# EAGLE board strobeshnik-2 (EAGLE 5.04)
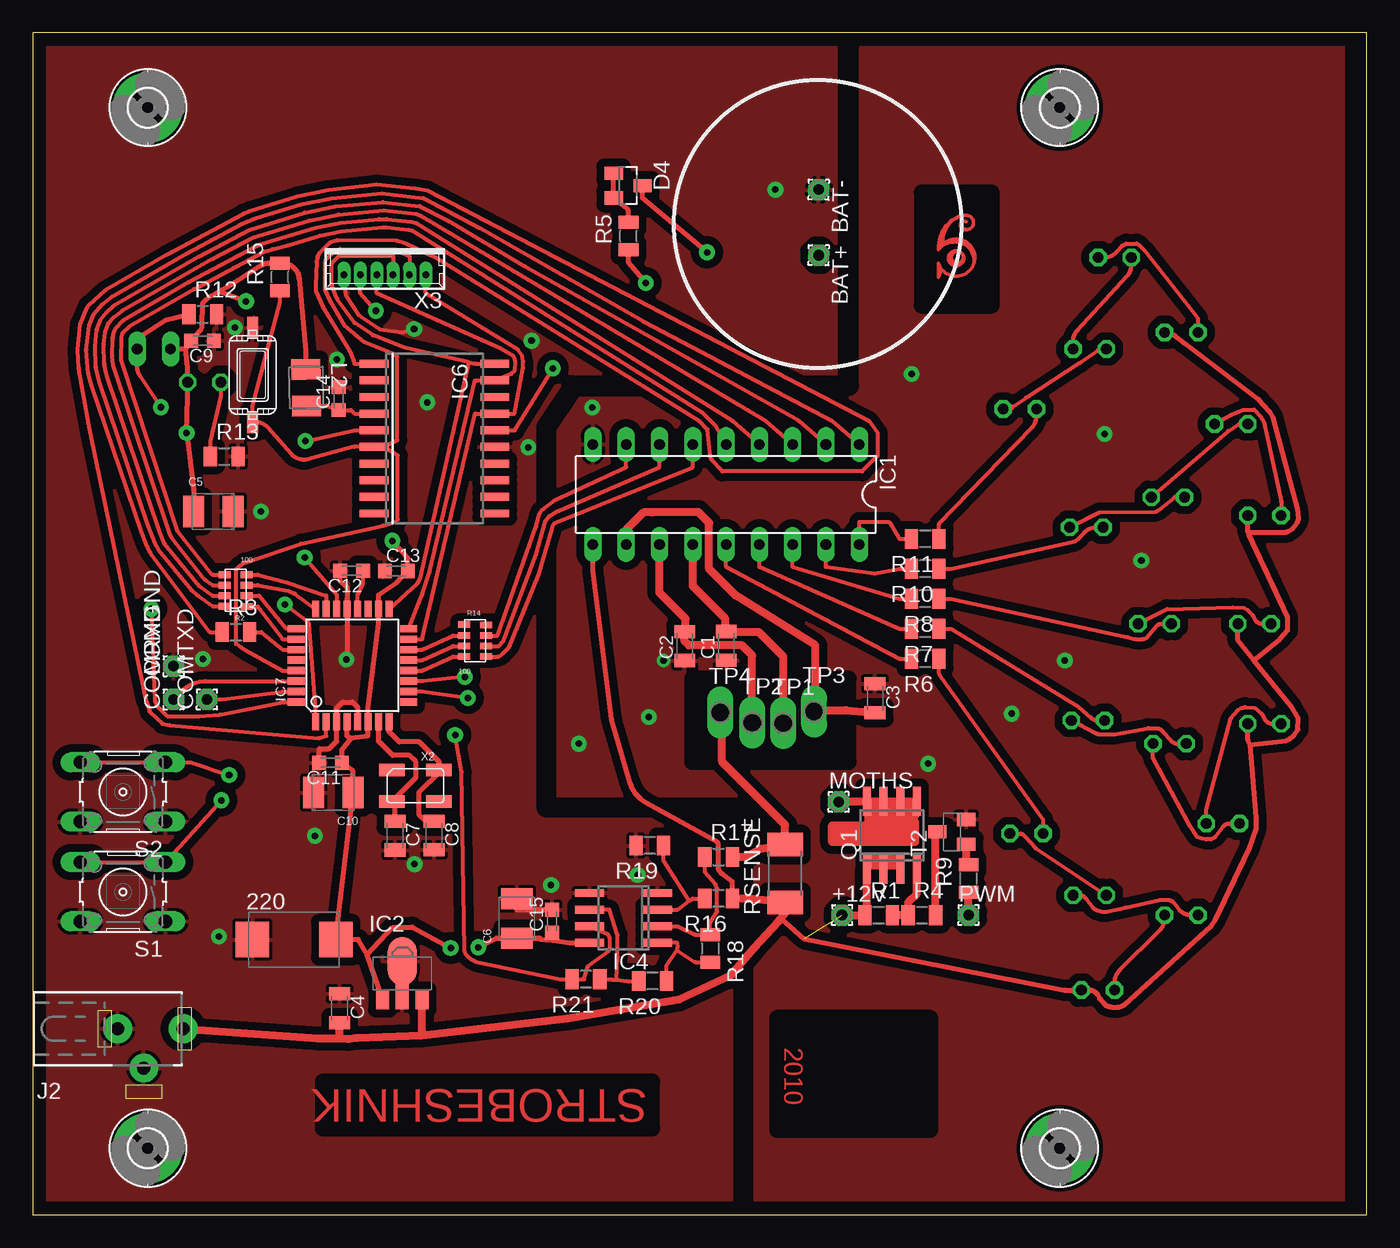
[diagram p0: board, top side]
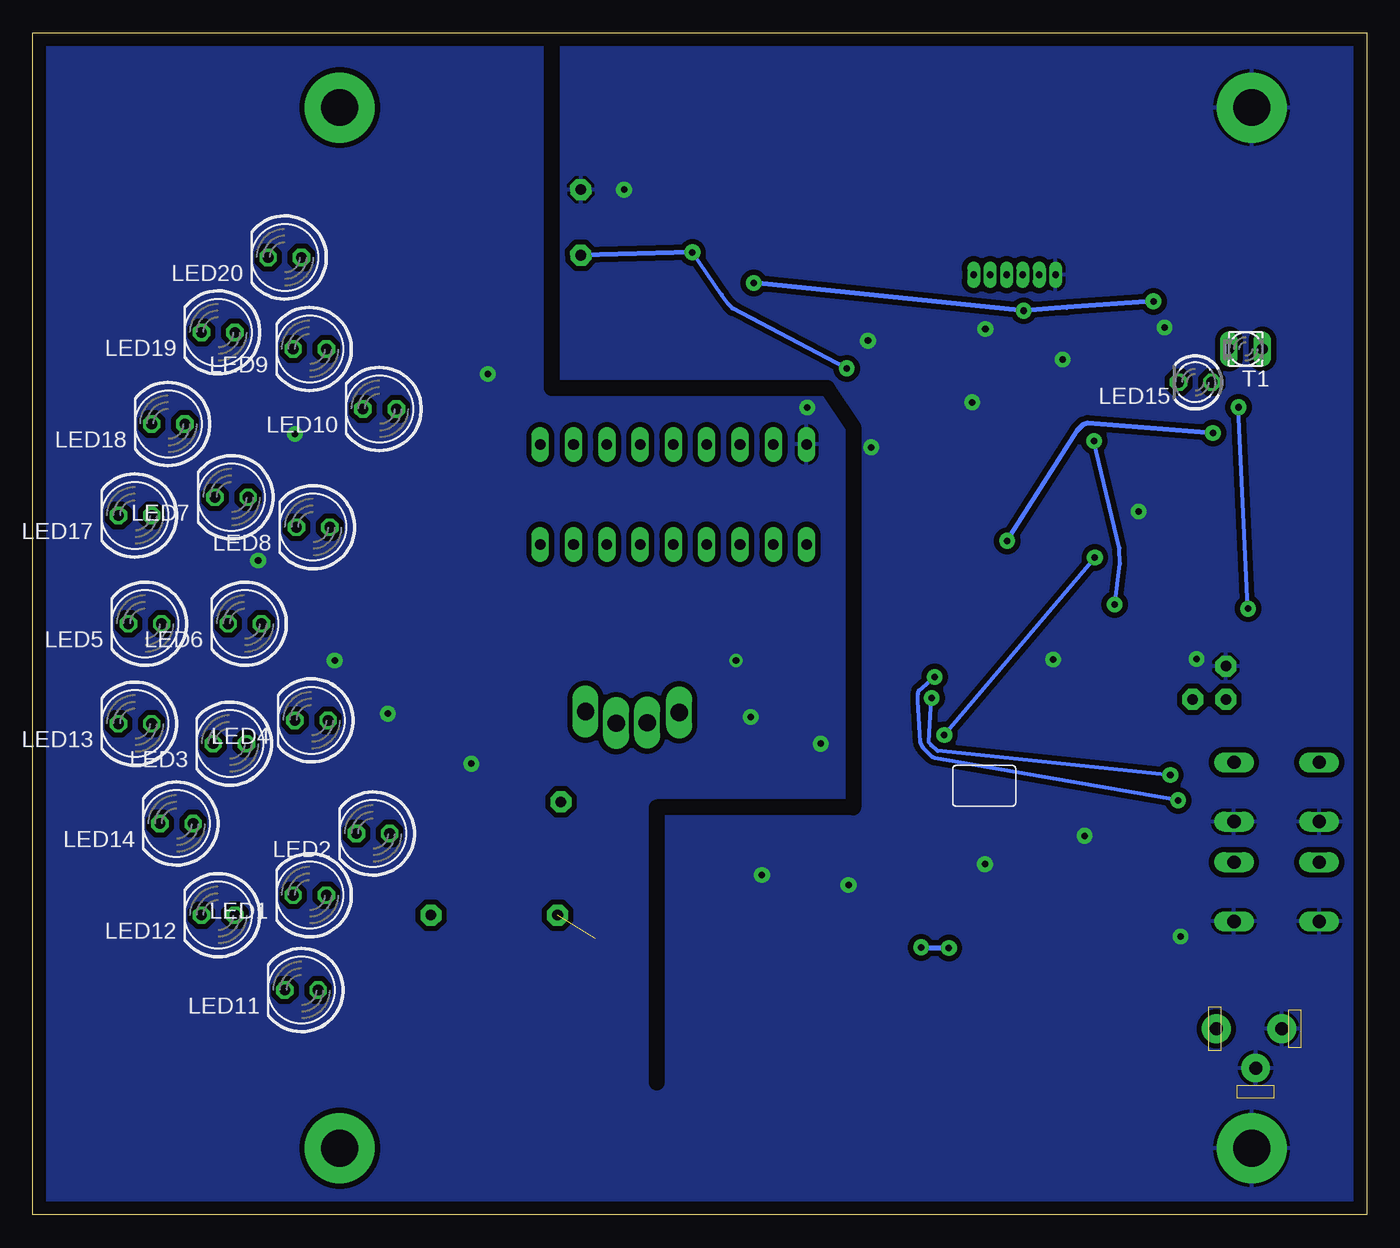
[diagram p1: board, bottom side, seen from below]

Size 101.78 x 90.16 mm. Coordinates in mm from the lower left corner, seen from the top.
Outline: 101.78,90.16 0,90.16 0,0 101.78,0 101.78,90.16
Copper layers (1*16): Top 0.035mm / dielectric 1.5mm / Bottom 0.035mm
Design rules "default": minimum track width 10mil, minimum drill 24mil, track to track 8mil, track to pad 8mil, pad to pad 8mil, via to via 8mil, smd to smd 8mil, copper to edge 40mil, drill to drill 8mil, minimum pad ring 10mil, minimum via ring 8mil, stop-mask expansion 4mil, vias tented up to drill 0mil, thermal gap 10mil
Net classes: 0 default: width 0.3 mm, drill 0.6 mm, clearance 0.25 mm; 1 supply1: width 0.4 mm, drill 0.6 mm, clearance 0.4 mm; 2 supply2: width 0.6 mm, drill 0.6 mm, clearance 0.4 mm
tRestrict: area 56.8,6.5 to 68.5,15; area 50.3,34.5 to 62.2,40.9; area 22.1,6.6 to 47.3,10.2; area 67.8,69.3 to 73.2,78; 6 lines
bRestrict: 6 lines

## Footprints (pad centres in the part's own frame; a part is rotated, then mirrored left to right if it is on the bottom)
D/7343-31R = smd 2.55 x 2.7: + 3.175,0; - -3.175,0
1,6/0,8 = drill 0.813 pad 1.6 octagon: 1 0,0
C0805K = smd 1 x 1.6: 1 -1.1,0; 2 1.1,0
SMC_B = smd 1.6 x 2.4: + -1.5,0; - 1.5,0
C0603K = smd 1.05 x 1.08: 1 -0.875,0; 2 0.875,0
SOT23@1 = smd 1 x 1.4: 1 -0.95,-1.1; 2 0.95,-1.1; 3 0,1.1
2,8-PAD = drill 2.8 pad 5.334 round: B2,8 0,0
DIL18 = drill 0.813 long: 1 -10.16,-3.81; 2 -7.62,-3.81; 3 -5.08,-3.81; 4 -2.54,-3.81; 5 0,-3.81; 6 2.54,-3.81; 7 5.08,-3.81; 8 7.62,-3.81; 9 10.16,-3.81; 10 10.16,3.81; 11 7.62,3.81; 12 5.08,3.81; 13 2.54,3.81; 14 0,3.81; 15 -2.54,3.81; 16 -5.08,3.81; 17 -7.62,3.81; 18 -10.16,3.81
SOT89 = smd 1 x 1.5: 1 -1.499,-1.981; 3 1.499,-1.981 | smd 1 x 2: 2 0,-1.727 | smd 2.2 x 3.7: 2@1 0,0.94
SO08 = smd 0.6 x 2.2: 1 -1.905,-2.6; 2 -0.635,-2.6; 3 0.635,-2.6; 4 1.905,-2.6; 5 1.905,2.6; 6 0.635,2.6; 7 -0.635,2.6; 8 -1.905,2.6
SO-20DW = smd 0.6 x 2.2: 1 -5.715,-4.6; 2 -4.445,-4.6; 3 -3.175,-4.6; 4 -1.905,-4.6; 5 -0.635,-4.6; 6 0.635,-4.6; 7 1.905,-4.6; 8 3.175,-4.6; 9 4.445,-4.6; 10 5.715,-4.6; 11 5.715,4.6; 12 4.445,4.6; 13 3.175,4.6; 14 1.905,4.6; 15 0.635,4.6; 16 -0.635,4.6; 17 -1.905,4.6; 18 -3.175,4.6; 19 -4.445,4.6; 20 -5.715,4.6
TQFP32-08 = smd 1.27 x 0.559: 1 -4.293,2.8; 2 -4.293,2; 3 -4.293,1.2; 4 -4.293,0.4; 5 -4.293,-0.4; 6 -4.293,-1.2; 7 -4.293,-2; 8 -4.293,-2.8; 17 4.293,-2.8; 18 4.293,-2; 19 4.293,-1.2; 20 4.293,-0.4; 21 4.293,0.4; 22 4.293,1.2; 23 4.293,2; 24 4.293,2.8 | smd 0.559 x 1.27: 9 -2.8,-4.293; 10 -2,-4.293; 11 -1.2,-4.293; 12 -0.4,-4.293; 13 0.4,-4.293; 14 1.2,-4.293; 15 2,-4.293; 16 2.8,-4.293; 25 2.8,4.293; 26 2,4.293; 27 1.2,4.293; 28 0.4,4.293; 29 -0.4,4.293; 30 -1.2,4.293; 31 -2,4.293; 32 -2.8,4.293
DCJ-SMALL = drill 1 pad 2.184 round: 1 0,3; 2 3,0; 3 0,-2
L3230M = smd 1.6 x 2.2: 1 -1.4,0; 2 1.4,0
LED5MM = drill 0.813 octagon: A -1.27,0; K 1.27,0
LED3MM = drill 0.813 octagon: A -1.27,0; K 1.27,0
SO-08 = smd 0.6 x 2.2: 1 -1.905,-2.6; 2 -0.635,-2.6; 3 0.635,-2.6; 4 1.905,-2.6; 5 1.905,2.6; 6 0.635,2.6; 7 -0.635,2.6; 8 -1.905,2.6
R0805 = smd 1 x 1.5: 1 -1.05,0; 2 1.05,0
RESSMD-YC16 = smd 0.508 x 0.914: R1$1 -1.23,-0.821; R1$2 -1.2,0.851; R2$1 -0.4,-0.821; R2$2 -0.4,0.851; R3$1 0.4,-0.821; R3$2 0.4,0.851; R4$1 1.2,-0.821; R4$2 1.2,0.851
R2010 = smd 1.8 x 2.7: 1 -2.2,0; 2 2.2,0
B3F-10XX = drill 1.016 long: 1 -3.251,2.261; 2 3.251,2.261; 3 -3.251,-2.261; 4 3.251,-2.261
SW_IT1181 = smd 1.676 x 0.813: P$1 -3.61,0; P$2 3.61,0
BPX81 = drill 0.813 long: C 1.27,0; E -1.27,0
SOT23-BEC = smd 1 x 1.4: B -0.95,-1.1; C 0,1.1; E 0.95,-1.1
P1-13Y = drill 1.321 pad 1.905 long: 1 0,0
XTAL_0532 = smd 1.93 x 0.965: 1 1.8,-1.2; 2 -1.8,-1.2; 3 -1.8,1.2; 4 1.8,1.2
53047-06 = drill 0.5 pad 0.698 long: 1 3.125,0.45; 2 1.875,0.45; 3 0.625,0.45; 4 -0.625,0.45; 5 -1.875,0.45; 6 -3.125,0.45

## Placement (x,y rotation side)
220  [D/7343-31R]  19.94,21 0 top
+12V  [1,6/0,8]  61.74,22.86 0 top
BAT+  [1,6/0,8]  59.96,73.2 269 top
BAT-  [1,6/0,8]  59.96,78.2 269 top
C1  10nF  [C0805K]  52.91,43.39 90 top
C2  10nF  [C0805K]  49.74,43.38 90 top
C3  10nF  [C0805K]  64.27,39.4 270 top
C4  2.2uF / 25V  [C0805K]  23.42,15.76 270 top
C5  10uF  [SMC_B]  13.78,53.66 0 top
C6  10uF/16V  [SMC_B]  36.93,22.62 90 top
C7  18  [C0805K]  27.64,28.93 270 top
C8  18  [C0805K]  30.62,28.94 270 top
C9  0.1  [C0603K]  12.95,66.67 180 top
C10  10uF  [SMC_B]  22.93,32.21 180 top
C11  100nF  [C0603K]  22.72,34.49 180 top
C12  100nF  [C0603K]  24.33,49.13 180 top
C13  100nF  [C0603K]  27.74,49.12 0 top
C14  100nF  [C0603K]  23.34,62.26 90 top
C15  100nF  [C0603K]  39.62,22.4 90 top
COMGND  [1,6/0,8]  10.74,41.85 90 top
COMRXD  [1,6/0,8]  10.74,39.31 90 top
COMTXD  [1,6/0,8]  13.28,39.31 90 top
D4  BAT54C  [SOT23@1]  45.42,78.51 270 top
H1  MOUNT-PAD-ROUND2.8  [2,8-PAD]  8.77,84.45 0 top
H2  MOUNT-PAD-ROUND2.8  [2,8-PAD]  78.36,84.45 0 top
H3  MOUNT-PAD-ROUND2.8  [2,8-PAD]  8.77,5.08 0 top
H4  MOUNT-PAD-ROUND2.8  [2,8-PAD]  78.36,5.08 0 top
IC1  [DIL18]  52.9,54.95 180 top
IC2  78L05F  [SOT89]  28.19,18.41 0 top
IC4  LM358D  [SO08]  45.08,22.65 90 top
IC6  DS3234  [SO-20DW]  30.66,59.21 270 top
IC7  MEGA8-AI  [TQFP32-08]  24.38,41.91 90 top
J2  [DCJ-SMALL]  8.48,14.2 270 top
L2  [L3230M]  20.87,63.1 271 top
LED1  ARL-5053UYC  [LED5MM]  80.65,24.38 180 bottom
LED2  [LED5MM]  75.82,29.08 180 bottom
LED3  [LED5MM]  86.74,35.94 180 bottom
LED4  [LED5MM]  80.52,37.72 180 bottom
LED5  [LED5MM]  93.22,45.09 180 bottom
LED6  [LED5MM]  85.6,45.09 180 bottom
LED7  [LED5MM]  86.61,54.74 180 bottom
LED8  [LED5MM]  80.39,52.45 180 bottom
LED9  [LED5MM]  80.65,66.04 180 bottom
LED10  [LED5MM]  75.31,61.47 180 bottom
LED11  [LED5MM]  81.28,17.14 180 bottom
LED12  [LED5MM]  87.63,22.86 180 bottom
LED13  [LED5MM]  93.98,37.46 180 bottom
LED14  [LED5MM]  90.81,29.84 180 bottom
LED15  L-34F3C  [LED3MM]  13.09,63.5 180 bottom
LED17  [LED5MM]  93.98,53.34 180 bottom
LED18  [LED5MM]  91.44,60.32 180 bottom
LED19  [LED5MM]  87.63,67.31 180 bottom
LED20  [LED5MM]  82.55,73.02 180 bottom
MOTHS  [1,6/0,8]  61.49,31.5 0 top
PWM  [1,6/0,8]  71.39,22.86 0 top
Q1  FDS6675  [SO-08]  65.55,28.96 0 top
R1  1K5  [R0805]  64.54,22.86 0 top
R2  100  [RESSMD-YC16]  15.49,47.62 90 top
R3  100  [R0805]  15.49,44.45 0 top
R4  470  [R0805]  67.84,22.86 0 top
R5  10K  [R0805]  45.45,74.66 90 top
R6  100  [R0805]  68.09,42.42 180 top
R7  100  [R0805]  68.09,44.7 180 top
R8  330  [R0805]  68.09,46.99 180 top
R9  100  [R0805]  71.39,25.65 90 top
R10  100  [R0805]  68.09,49.28 180 top
R11  100  [R0805]  68.09,51.56 180 top
R12  5K  [R0805]  12.97,68.7 0 top
R13  220  [R0805]  14.61,57.85 0 top
R14  100  [RESSMD-YC16]  33.74,43.79 270 top
R15  10K  [R0805]  18.86,71.54 90 top
R16  9K  [R0805]  52.32,24.13 180 top
R17  9K  [R0805]  52.32,27.3 0 top
R18  1K  [R0805]  51.69,20.32 270 top
R19  1K  [R0805]  47.07,28.17 180 top
R20  1K  [R0805]  47.29,17.84 180 top
R21  110K  [R0805]  42.21,17.97 180 top
RSENSE  0.3  [R2010]  57.4,26.03 90 top
S1  [B3F-10XX]  6.88,24.64 180 top
S2  [B3F-10XX]  6.88,32.26 180 top
SW1  BUTTON-IT_1181  [SW_IT1181]  16.78,64.07 270 top
T1  L-32P3C  [BPX81]  9.24,66.04 180 bottom
T2  BTA42  [SOT23-BEC]  70.12,29.21 90 top
TP1  TPPAD1-13Y  [P1-13Y]  57.26,37.5 0 top
TP2  TPPAD1-13Y  [P1-13Y]  54.89,37.54 0 top
TP3  TPPAD1-13Y  [P1-13Y]  59.61,38.39 0 top
TP4  TPPAD1-13Y  [P1-13Y]  52.46,38.33 0 top
X2  20.000  [XTAL_0532]  29.19,32.73 180 top
X3  53047-06  [53047-06]  26.87,72.15 180 top

## Library data of the parts
220 C1-C15 L2 R1 R3-R13 R15-R21 RSENSE = rcl
+12V BAT+ BAT- COMGND COMRXD COMTXD MOTHS PWM = wirepad
D4 = diode
H1-H4 = holes
IC1 = uln-udn
IC2 IC4 = linear
IC6 = 0-ds3234
IC7 = atmel
J2 LED1-LED15 LED17-LED20 R2 R14 SW1 X2 = 0-svo
Q1 = transistor-power
S1 S2 = switch-omron
T1 = opto-trans-siemens
T2 = transistor
TP1-TP4 = testpad
X3 = con-molex

## Nets
+5V: 220.+ C5.+ C6.+ C9.2 C10.+ C11.1 C13.2 C15.1 IC2.1 IC4.8 IC7.4 IC7.6 IC7.18 L2.1 LED15.A R5.1 R15.2 T1.C X3.2
+12V [supply1]: +12V.1 C4.2 IC1.10 IC2.3 J2.1 LED5.A LED11.A LED13.A LED17.A LED19.A Q1.1 R1.1 R16.1 RSENSE.1
BTN+: IC7.11 S1.3 S1.4
BTNSET: IC7.10 S2.3 S2.4
GND: 220.- BAT-.1 C1.1 C2.1 C3.1 C4.1 C5.- C6.- C7.2 C8.2 C9.1 C10.- C11.2 C12.2 C13.1 C14.2 C15.2 COMGND.1 H1.B2,8 H3.B2,8 IC1.9 IC2.2 IC2.2@1 IC4.4 IC4.5 IC6.15 IC7.3 IC7.5 IC7.21 J2.2 J2.3 R12.2 R13.2 R19.2 S1.1 S1.2 S2.1 S2.2 SW1.P$1 T2.E X3.1
INDEX: IC7.32 R12.1 T1.E
L1: IC1.5 R2.R4$2
L1X: IC7.23 R2.R4$1
L2: IC1.4 R2.R3$2
L2X: IC7.24 R2.R3$1
L3: IC1.3 R2.R2$2
L3X: IC7.25 R2.R2$1
L4: IC1.2 R2.R1$2
L4X: IC7.26 R2.R1$1
L5: IC1.1 R3.1
L5X: IC7.27 R3.2
LL1: IC1.14 R6.2
LL2: IC1.15 R7.2
LL3: IC1.16 R8.2
LL4: IC1.17 R10.2
LL5: IC1.18 R11.2
M1: IC1.6 R14.R4$2
M2: IC1.7 R14.R3$2
M3: IC1.8 R14.R2$2
MISO: IC6.19 IC7.16 X3.3
MODHS: MOTHS.1 Q1.5
MOSI: IC6.17 IC7.15 X3.6
N$1: D4.1 D4.2 R5.2
N$2: IC6.18
N$3: C12.1 IC7.20
N$4: R9.2 T2.B
N$6: Q1.4 R1.2 R4.1
N$9: BAT+.1 D4.3 IC6.16
N$10: C1.2 IC1.13 TP1.1
N$11: C2.2 IC1.12 TP2.1
N$12: C3.2 IC1.11 TP3.1
N$14: LED1.K LED2.A
N$15: LED3.K LED4.A
N$16: LED5.K LED6.A
N$17: LED7.K LED8.A
N$18: LED9.K LED10.A
N$19: LED2.K R6.1
N$20: LED4.K R7.1
N$21: LED6.K R8.1
N$22: LED8.K R10.1
N$23: LED10.K R11.1
N$25: LED1.A LED12.K
N$26: LED11.K LED12.A
N$27: LED13.K LED14.A
N$29: LED17.K LED18.A
N$30: LED19.K LED20.A
N$31: IC7.14 R14.R2$1
N$32: IC7.13 R14.R3$1
N$33: LED15.K R13.1
N$34: IC7.12 R14.R4$1
N$35: IC4.1 R18.2 R20.1
N$36: IC4.2 R17.1 R18.1
N$37: IC4.3 R16.2 R19.1
N$38: R17.2 RSENSE.2 TP4.1
N$39: IC4.6 R20.2 R21.1
N$40: LED3.A LED14.K
N$41: LED7.A LED18.K
N$42: LED9.A LED20.K
N$43: R4.2 T2.C
N$53: C14.1 IC6.4 L2.2
PWM: PWM.1 R9.1
RESET#: IC6.6 IC7.29 R15.1 SW1.P$2 X3.5
RTCINT: IC6.5 IC7.1
RTCSEL#: IC6.1 IC7.2
RXD: COMRXD.1 IC7.30
SCK: IC6.20 IC7.17 X3.4
SENSE: IC4.7 IC7.22 R21.2
TXD: COMTXD.1 IC7.31
XTAL1: C7.1 IC7.7 X2.4
XTAL2: C8.1 IC7.8 X2.2

## Tracks (layer width: path | path; a pad name or v marks a point on that pad's centre or on a via)
+5V  (via drill 0.5 pad 1.2)
  Top 0.3: X3.2 24.99,70.3 v26.18,68.96
  Top 0.4: 20.82,65.9 | 20.82,65.9 20.32,71.43 arc85 19.05,72.59 R15.2 18.04,72.59 arc33 17.35,72.38 14.93,70.84 14.23,70.44 | 20.82,65.9 L2.1 | 24.27,36.3 23.98,36.53 IC7.4 | 24.27,36.3 23.59,35.48 C11.1 24.43,33.86 C10.+ 220.+ 24.84,21 25.52,19.84 | 24.27,36.3 | 24.27,36.3 24.35,36.39 25.58,36.53 IC7.6 25.58,38.7 26.38,45.12 IC7.18 26.38,47.29 27.75,48.2 C13.2 28.61,50.11 v27.44,51.41 | R5.1 45.45,72.66 v46.77,71.09 | C5.+ 12.28,55.31 v11.74,59.64 11.82,62.39 LED15.A 11.82,64.61 11.67,66.04 | IC4.8 40.93,20.74 39.72,20.95 39.57,20.96 | 38.67,21.1 38.67,21.03 39.57,20.96 | 39.57,20.96 C15.1 | 25.52,19.84 27.47,21.92 28.95,21.95 v31.88,20.36 | v34,20.41 35.37,21.1 | 11.67,66.04 T1.C | IC2.1 25.52,19.84 | 11.67,66.04 C9.2 12.78,67.44 12.92,67.74 12.97,69.52 arc-29 13.58,70.07 14.23,70.44 | 14.23,70.44 v16.28,69.68 | L2.1
  Top 0.406: 35.37,21.1 36.93,21.1 | 36.93,21.1 C6.+ 36.93,21.1 | 36.93,21.1 38.67,21.1
  Bottom 0.4: v46.77,71.09 v26.18,68.96 22.88,69.21 v16.28,69.68 | v27.44,51.41 22.06,59.86 21.64,60.28 21.3,60.41 v11.74,59.64 | v31.88,20.36 33.95,20.36 v34,20.41
+12V  (1 unrouted)
  Top 0.4: IC1.10 42.74,49.12 44.17,37.8 45.57,32.96 arc45 46.78,31.45 52.27,28.41 52.3,28.23 52.32,28.11 52.33,26.34 52.63,25.98 53.37,25.42 R16.1 | LED5.A 91.95,43.82 93.17,42.31 | 92.88,35.87 95.65,36.17 95.86,36.28 96.25,36.61 96.53,37 96.54,37.89 95.99,38.83 93.17,42.31 | 93.17,42.31 95.15,43.91 95.76,44.57 95.75,45.6 92.79,51.9 92.79,52.08 | LED17.A 92.71,52.08 92.79,52.08 | 92.88,35.87 92.71,36.2 LED13.A | 92.88,35.87 93.35,30.27 93.35,29.46 92.8,27.93 90.22,22.46 89.9,22 83.34,16.06 arc-26 83.08,15.92 82.82,15.84 82.33,15.85 arc-16 82.15,15.88 82.05,15.91 arc-30 81.76,16.08 81.4,16.47 81.21,16.82 arc61 80.65,17.14 LED11.A 78.75,17.14 58.85,21.08 57.09,22.62 | 92.88,35.87 | 92.79,52.08 95.68,52.07 95.77,52.11 96.14,52.33 96.47,52.79 96.58,53.1 96.5,53.82 94.63,60.81 94.37,61.25 93.55,62.18 87.8,66.5 87.22,66.96 arc90 86.27,67.01 LED19.A
  Top 0.6: 23.42,13.46 | 23.42,13.46 21.76,13.46 J2.1 | 23.42,13.46 24.07,13.42 24.7,13.51 29.69,13.71 | 23.42,13.46 C4.2 | 29.69,13.71 40.8,14.98 48.88,16.35 49.32,16.44 53.33,18.33 55.03,20.34 55.05,20.37 56.9,22.37 57.09,22.62 57.68,23.37 RSENSE.1 54.57,24.13 R16.1 | 29.69,13.71 IC2.3
  Top 0.61: Q1.1 63.65,23.02 R1.1 +12V.1
BTN+  (via drill 0.5 pad 1.2)
  Top 0.3: 29.77,40.71 IC7.11 | S1.4 S1.3 v14.4,31.62
  Top 0.32: v32.96,41.03 29.77,40.71
  Bottom 0.32: v14.4,31.62 32.95,34.84 33.17,34.93 33.86,35.63 34.04,36.03 34.25,39.2 34.23,39.73 34.17,39.99 v32.96,41.03
BTNSET  (via drill 0.5 pad 1.2)
  Top 0.3: S2.4 S2.3 12.05,34.52 v14.98,33.55
  Top 0.32: IC7.10 29.72,39.91 v33.2,39.42
  Bottom 0.32: v14.98,33.55 32.75,35.39 33.22,35.81 33.41,36.08 v33.2,39.42
GND  (via drill 0.5 pad 1.02, 0.5 pad 1.2)
  Top 0.305: 23.7,71.78 23.9,70.1 24.91,68.58 26.44,67.56 28.21,67.31 28.98,67.56
  Top 0.4: IC7.5 24.78,38.74 24.4,39.12 23.64,39.12 23.13,38.61 23.18,38.56 IC7.3 23.18,36.12 22.63,35.56 21.86,35.56 21.86,34.54 | C12.2 23.45,48.33 24,47.78 24,46.98 | 24,46.98 24,42.43 v23.93,42.36 | IC7.21 23.98,46.96 24,46.98
  Top 0.406: C15.2 36.93,23.27 C6.-
  other vias: 42.69,61.59 21.52,28.91 46.14,25.93 48.12,42.27 17.4,53.66 56.66,78.2 14.19,21.23 37.8,58.55 29.1,67.57 15.42,67.69 23.2,65.24 12.99,42.4 29.13,26.75 30.1,61.98 46.99,37.97 67.06,64.14 81.79,59.56 84.58,49.91 68.33,34.42 74.68,38.23 78.74,42.29 41.66,35.94 38.06,66.67 39.54,25.17
  pour Bottom (isolate 0.406): -6.08,90.17 103.78,90.17 103.78,0 -6.08,0
  pour Top (isolate 0.61): 99.95,90.8 99.95,-0.63 -12.45,-0.63 -12.45,90.17 arc-90 -11.81,90.8
GRUU1
  Top 0.254: 71.25,75.74 arc128 70.78,75.42 arc232 71.33,76.22 arc38 70.85,76.22 arc71 69.11,73.91 69.11,73.6 69.43,73.99 arc-298 69.11,72.56 69.11,71.53 69.35,72.09
GRUU2
  Top 0.254: 69.27,73.83 69.59,74.02 arc-23 70.08,74.18 70.26,74.2 arc-25 70.8,74.14 71.01,74.07 71.25,73.9 arc-34 71.7,73.31 71.73,73.26 arc-21 71.81,72.81 71.81,72.64
GRUU3
  Top 0.254: 70.22,75.9 69.83,75.46 arc23 69.58,75.02 69.49,74.74 arc18 69.43,74.34 69.43,74.07 69.35,73.99 69.27,74.31
INDEX  (via drill 0.5 pad 1.2)
  Top 0.3: IC7.32 19.06,39.11 14.26,38.15 12.67,38.03 10.27,38.05 9.52,38.76 | 9.35,39.21 v9.05,46.24
  Top 0.32: 9.52,38.76 9.35,39.21 | v9.78,61.6 8.18,63.99 arc-34 7.97,64.7 T1.E
  Top 0.4: 8.11,66.04 T1.E 8.46,67.16 10.17,68.27 R12.1
  Bottom 0.32: v9.05,46.24 v9.78,61.6
L1
  Top 0.3: IC1.5 52.13,60.15 51.09,61.19 28.89,75.09 28.72,75.13 28.66,75.13 26.98,75.31 26.68,75.31 23.54,75.02 21.89,74.69 19.48,73.94 18.3,73.66 17.65,73.46 12.3,70.61 7.38,67.77 6.87,67.27 6.79,66.97 6.74,65.23 11.06,52.14 13.71,48.82 R2.R4$2
L1X
  Top 0.3: IC7.23 22.38,47.24 19.36,48.23 17.17,48.82 R2.R4$1
L2
  Top 0.3: IC1.4 53.37,60.56 29.22,75.66 28.9,75.74 27.01,75.94 26.42,75.94 23.48,75.66 21.55,75.28 17.45,74.07 16.88,73.8 11.93,71.16 6.9,68.22 6.32,67.62 6.17,67.25 6.1,66.85 6.07,65.49 6.12,64.81 10.47,51.87 10.62,51.63 13.16,48.42 13.71,48.02 R2.R3$2
L2X
  Top 0.3: R2.R3$1 17.17,48.02 19.49,47.6 20,47.39 IC7.24
L3
  Top 0.3: IC1.3 55.91,60.56 29.59,76.2 29.24,76.34 26.77,76.61 23.31,76.29 21.05,75.84 16.85,74.56 13.73,72.91 6.83,68.97 6.16,68.46 5.8,68.04 5.51,67.33 5.41,66.37 5.46,64.92 5.62,64.03 9.68,52.12 10.08,51.16 12.74,47.92 13.71,47.23 R2.R2$2
L3X
  Top 0.3: R2.R2$1 17.27,47.23 19.31,44.74 IC7.25
L4
  Top 0.3: IC1.2 58.45,60.56 37.57,72.32 31.75,75.78 29.53,76.94 26.72,77.25 23.09,76.91 20.73,76.44 16.57,75.13 12.67,73.08 6.17,69.33 5.63,68.84 5.17,68.27 4.89,67.49 4.76,66.25 4.82,64.69 5.05,63.59 8.81,52.56 9.41,51.04 9.61,50.71 12.11,47.62 12.63,47.2 13.71,46.42 R2.R1$2
L4X
  Top 0.3: IC7.26 19.06,43.91 17.17,46.39 R2.R1$1
L5
  Top 0.3: IC1.1 60.99,60.56 46.63,68.11 34.04,75.28 29.82,77.54 26.63,77.91 22.79,77.53 20.48,77.08 17.08,76.05 15.98,75.59 11.77,73.34 5.99,70 5.35,69.49 4.63,68.69 4.29,67.85 4.08,65.99 4.14,65.09 4.24,64.19 4.49,63.24 8.29,52.05 8.74,50.97 8.96,50.51 13.51,44.45 R3.1
L5X
  Top 0.3: IC7.27 19.06,43.11 17.44,44.45 R3.2
LL1
  Top 0.3: 52.9,49.42 | 52.9,49.42 66.14,42.42 R6.2 | 52.9,49.42 IC1.14
LL2
  Top 0.3: IC1.15 55.44,49.42 66.14,44.7 R7.2
LL3
  Top 0.3: IC1.16 57.98,49.42 66.14,46.99 R8.2
LL4
  Top 0.3: IC1.17 60.52,49.42 64.17,48.92 64.3,48.92 66.14,49.28 R10.2
LL5
  Top 0.3: IC1.18 63.06,52.86 63.5,52.86 63.69,52.85 65.31,52.85 65.36,52.82 65.42,52.76 66.14,51.56 R11.2
M1
  Top 0.3: R14.R4$2 35.53,42.59 35.87,42.83 36.34,43.3 38.62,48.92 39.6,52.3 39.69,52.6 39.85,52.79 50.36,57.04 IC1.6
M2
  Top 0.3: R14.R3$2 35.53,43.39 35.91,43.78 38.41,50.36 39.13,52.92 39.41,53.3 39.97,53.63 47.82,57.04 IC1.7
M3
  Top 0.3: R14.R2$2 35.45,44.19 38.41,52.51 38.68,53.48 38.91,53.82 39.8,54.49 45.28,57.04 IC1.8
MISO
  Top 0.3: X3.3 26.24,70.3 35.74,66.05 36.65,65.53 36.75,65.37 36.83,65.03 36.79,64.43 36.51,64.15 IC6.19 33.75,63.65 30.3,49.05 29.72,47.29 IC7.16
MODHS
  Top 0.61: Q1.5 61.55,31.56 MOTHS.1
MOSI
  Top 0.3: X3.6 29.99,70.3 37.01,66.01 37.31,65.56 37.42,65.09 37.42,64.6 36.75,61.11 IC6.17 33.75,61.11 29.71,43.91 IC7.15
N$1
  Top 0.4: R5.2 45.45,76.66 D4.2 D4.1
N$3
  Top 0.32: C12.1 25.2,48.18 24.78,47.25 IC7.20
N$4
  Top 0.61: T2.B 71.22,26.87 R9.2
N$5
  Top 0.61: 63.77,26.67 66.06,26.67
N$6
  Top 0.61: R1.2 R4.1 66.82,22.89 66.82,23.88 67.46,24.51 Q1.4
N$7
  Top 0.61: 63.77,27.18 66.06,27.18
N$8
  Top 0.61: 63.77,30.99 67.33,30.99
N$9  (via drill 0.5 pad 1.2)
  Top 0.32: IC6.16 36.77,59.84 | 36.77,59.84 | 36.77,59.84 v39.68,64.57
  Top 0.4: D4.3 46.52,77.55 v51.45,73.41
  Bottom 0.32: v39.68,64.57 48.41,69.14 48.71,69.46 49.22,70.18 v51.45,73.41
  Bottom 0.4: v51.45,73.41 BAT+.1
N$10
  Top 0.61: TP1.1 57.26,42.58 55.39,44.45 52.95,44.45 C1.2 52.85,44.55 52.85,45.47 50.36,47.96 IC1.13
N$11
  Top 0.61: TP2.1 54.88,42.67 54.12,43.43 50.06,43.43 49.74,43.75 C2.2 49.8,44.54 49.8,45.47 47.82,47.45 IC1.12
N$12
  Top 0.61: IC1.11 45.28,52.25 46.6,53.58 47.25,53.58 47.26,53.59 50.31,53.59 50.79,53.59 51.6,52.78 51.6,49.28 51.7,49.15 53.61,47.24 59.71,43.43 59.71,38.49 | TP3.1 59.71,38.49 | 59.71,38.49 62.05,38.49 C3.2
N$13
  Top 0.61: 67.33,30.48 63.77,30.48 63.77,29.97 67.33,29.97 67.33,29.46 63.77,29.46 63.77,29.21 67.33,29.21 67.33,28.7 63.77,28.7
N$14
  Top 0.3: LED2.A 75.33,29.08 arc-48 75.7,28.87 76.52,27.96 LED1.K
N$15
  Top 0.3: LED4.A 81.11,36.73 arc28 81.4,36.66 82.57,36.65 85.1,37.12 85.73,37.11 arc-49 86.2,36.9 86.86,36.15 arc48 87.34,35.94 LED3.K
N$16
  Top 0.3: LED6.A 86.53,46.2 91.54,46.34 92.43,46.3 92.68,46.15 93.07,45.73 93.25,45.41 arc61 93.8,45.09 LED5.K
N$17
  Top 0.3: LED7.K 87.12,54.74 85.86,53.72 85.69,53.64 81.36,53.57 LED8.A
N$18
  Top 0.3: LED10.A 74.5,61.47 arc51 74.78,61.64 75.81,62.33 79.9,64.98 81.23,65.92 arc-48 81.68,66.04 LED9.K
N$19
  Top 0.3: R6.1 69.14,41.27 77.09,30.14 arc-90 77.09,30.14 LED2.K
N$20
  Top 0.3: R7.1 70.04,44.7 79.79,38.75 80.74,37.93 arc48 81.21,37.72 LED4.K
N$21
  Top 0.3: R8.1 70.04,46.99 83.54,44.06 84.13,43.91 84.68,43.91 85,44 85.72,44.88 arc-47 86.09,45.09 LED6.K
N$22
  Top 0.3: R10.1 70.04,49.28 79.55,51.39 79.83,51.6 80.22,52.03 arc-48 81.16,52.45 LED8.K
N$23
  Top 0.3: R11.1 69.14,52.71 76.22,60.04 arc44 76.58,60.92 LED10.K
N$24
  Top 0.61: 63.52,29.72 60.98,29.72 60.98,28.45 67.33,28.45
N$25
  Top 0.3: LED1.A 79.88,24.38 arc-58 80.34,24.12 80.86,23.44 arc41 81.89,23.1 82.8,23.3 83.33,23.44 86.02,24.02 86.59,24.02 arc-50 87.09,23.77 87.46,23.29 arc49 88.41,22.86 LED12.K
N$26
  Top 0.3: LED11.K 82.55,17.74 arc-45 82.92,18.64 85.99,21.71 arc45 86.36,22.6 LED12.A
N$27
  Top 0.3: LED14.A 89.54,30.91 91.41,37.86 91.95,38.49 92.21,38.65 92.5,38.73 93.22,38.68 93.77,38.21 94.01,37.79 arc60 94.56,37.46 LED13.K
N$28
  Top 0.61: 63.52,29.21 61.49,29.21 61.49,28.96 63.27,28.96
N$29
  Top 0.3: LED17.K 95.25,54.4 93.91,60.51 93.68,60.88 93.2,61.41 92.36,61.41 91.46,61.03 LED18.A
N$30
  Top 0.3: LED19.K 88.9,68.37 84.78,73.61 84.41,73.96 84.23,74.09 83.43,74.09 83.12,73.94 82.72,73.47 arc-49 81.76,73.02 LED20.A
N$31
  Top 0.3: 32.07,44.19 R14.R2$1 | 32.07,44.19 29.71,43.11 IC7.14 | 32.07,44.19
N$32
  Top 0.3: 32.07,43.39 R14.R3$1 | 32.07,43.39 29.71,42.31 IC7.13 | 32.07,43.39
N$33
  Top 0.32: LED15.K 14.36,62.43 13.56,59.01 R13.1
N$34
  Top 0.3: R14.R4$1 32.07,42.59 29.71,41.51 IC7.12
N$35
  Top 0.32: 49.16,20.2 | 49.16,20.2 49.22,20.47 49.19,20.74 IC4.1 | 49.16,20.2 48.34,18.99 R20.1 | 49.16,20.2 50.53,19.27 R18.2
N$36
  Top 0.32: R17.1 51.27,26.15 52.11,25.21 52.22,24.91 52.21,23.15 51.69,22.28 R18.1 50.53,21.37 49.19,22.01 IC4.2
N$37
  Top 0.32: 50.06,23.94 48.12,27.01 R19.1 | 50.06,23.94 49.19,23.28 IC4.3 | 50.06,23.94 | 50.06,23.94 50.36,24.13 R16.2
N$38
  Top 0.6: R17.2 54.41,27.3 55.51,27.94 RSENSE.2
  Top 0.61: RSENSE.2 57.4,29.74 52.6,34.54 52.6,38.19 TP4.1
N$39
  Top 0.32: R21.1 44.17,17.97 44.17,17.94 44.55,17.92 | R20.2 45.33,17.84 44.62,17.92 44.55,17.92 | 44.55,17.92 44.62,19.67 44.62,21.33 43.99,23.28 IC4.6
N$40
  Top 0.3: LED3.A 85.47,34.88 88.27,29.68 88.87,28.82 89.2,28.69 89.53,28.64 89.9,28.65 90.22,28.81 90.82,29.62 arc-50 91.31,29.84 LED14.K
N$41
  Top 0.3: LED18.K 92.05,60.32 91.2,59.78 LED7.A
N$42
  Top 0.3: LED9.A 79.38,66.61 arc-42 79.71,67.46 83.49,71.6 arc42 83.82,72.46 LED20.K
N$43
  Top 0.61: R4.2 68.89,29.07 T2.C
N$53
  Top 0.32: IC6.4 24.55,61.11 24.29,61.39 C14.1 22.4,61.72 | L2.2 22.4,61.72 | 22.4,61.72
PWM
  Top 0.61: PWM.1 R9.1
RESET#
  Top 0.3: 26.7,58.54 27.81,59.09 27.81,65.43 27.59,65.65 25.3,66.57 23.79,67.82 22.71,69.63 22.32,70.58 22.3,71.15 22.3,71.46 22.3,72.63 22.35,72.85 23.09,73.59 23.42,73.65 27.61,73.64 27.71,73.63 27.97,73.51 28.74,73.11 X3.5 | IC7.29 19.06,41.51 16.18,43.1 15.84,43.3 15.5,43.55 15.51,46.04 15.51,49.22 15.75,49.47 16.16,49.74 20.47,51.2 26.73,52.57 27.71,52.87 27.84,53.03 27.84,57.94 27.42,58.22 26.7,58.54 | 18.86,69.61 R15.1 | 24.5,58.57 21.03,57.64 arc-64 19.75,58.02 17.96,60.03 arc48 17.01,60.46 SW1.P$2 | 26.7,58.54 | 26.7,58.54 IC6.6 | 26.7,58.54
  Top 0.32: SW1.P$2 16.78,61.71 18.86,69.61 | IC6.6 24.5,58.57
RTCINT  (via drill 0.5 pad 1.2)
  Top 0.3: IC7.1 21.58,38.65 21.08,45.09 20.99,45.25 v19.24,46.55 | IC6.5 24.55,59.84 v20.81,59.02
  Bottom 0.3: v19.24,46.55 18.82,49.68 18.87,50.85 v20.81,59.02
RTCSEL#
  Top 0.3: IC6.1 24.53,64.92 24.47,65.17 24.17,65.89 22.15,69.22 21.59,70.5 21.59,70.86 21.65,72.72 21.73,73.09 21.87,73.33 22.66,74.13 23.28,74.32 27.77,74.28 28.48,74.07 30.89,72.93 50.83,60.56 51.5,59.89 51.7,57.83 51.79,57.6 52.61,56.71 63.28,56.71 64.45,57.88 64.45,59.64 63.78,60.56 30.1,78.15 29.19,78.28 26.22,78.59 22.56,78.17 20.17,77.67 16.58,76.57 16.07,76.36 10.23,73.23 5.54,70.52 4.31,69.42 4.16,69.22 3.6,67.95 3.42,65.97 3.52,64.58 4.34,59.92 8.69,39.12 8.92,38.39 9.9,37.46 10.45,37.36 21.79,36.37 22.38,36.53 IC7.2
RXD
  Top 0.3: COMRXD.1 11.39,39.97 arc-45 13.19,40.71 19.05,40.71 IC7.30
SCK
  Top 0.3: X3.4 27.49,73.14 23.42,73.14 23.34,73.12 22.84,72.62 22.81,72.56 22.81,70.93 22.81,70.89 22.85,70.83 23.24,69.89 23.24,69.81 24.55,68.03 25.96,67.08 28.38,66.14 33.28,65.03 | IC6.20 33.75,64.92 33.28,65.03 | IC7.17 29.36,48.19 29.39,48.22 29.57,48.65 33.28,65.03
SENSE  (via drill 0.5 pad 1.2)
  Top 0.3: 23.18,47.3 IC7.22
  Top 0.32: v20.75,50.14 23.18,47.3 | v32.22,36.61 32.74,33.8 32.94,20.13 33.06,19.85 33.41,19.5 33.78,19.31 40.25,17.97 R21.2 42.07,17.97 42.38,18.99 43.95,20.16 44.04,20.34 44.04,21.07 43.93,21.35 IC4.7
  Bottom 0.32: v32.22,36.61 v20.75,50.14
TXD
  Top 0.32: IC7.31 19.05,39.91 14.49,39.31 COMTXD.1
XTAL1
  Top 0.4: IC7.7 26.38,36.12 27.45,35.05 28.72,35.05 29.23,34.54 29.23,33.37 X2.4 27.64,31.28 C7.1
XTAL2
  Top 0.4: IC7.8 27.18,36.84 27.96,36.07 29.48,36.07 31.01,34.54 31.01,33.95 X2.2 30.99,33.76 29.48,32.26 29.48,30.48 29.99,29.97 30.56,29.97 C8.1
(copper drawn outside any net)
  shapes: Top circle x2

## Text on the board
Top: 2010 | STROBESHNIK